# Altium PCB tpms-master.pcbdoc
Units mm, origin at the board's own origin, x right, y up, seen from the top; angles counter-clockwise.
Board outline 79.25 x 49.25 mm, 2 copper layers (Top Layer, Bottom Layer); 57 components, 84 nets, 235 pads, 34 vias.
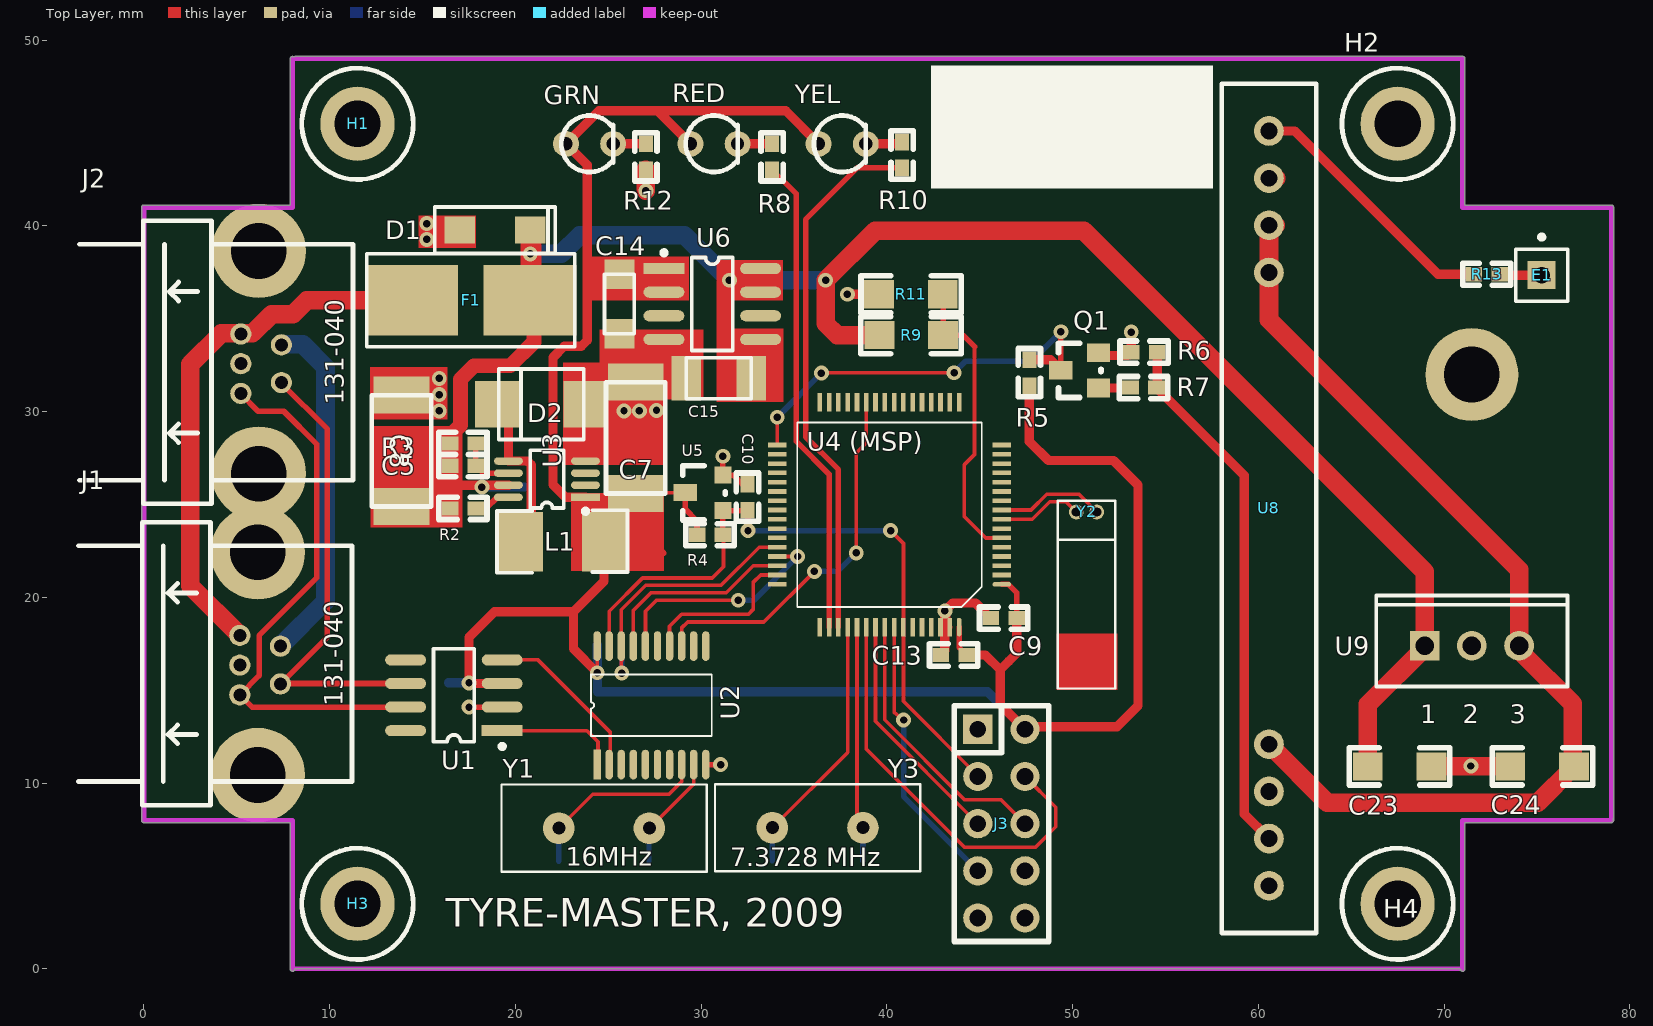
[diagram p0: Top Layer view]
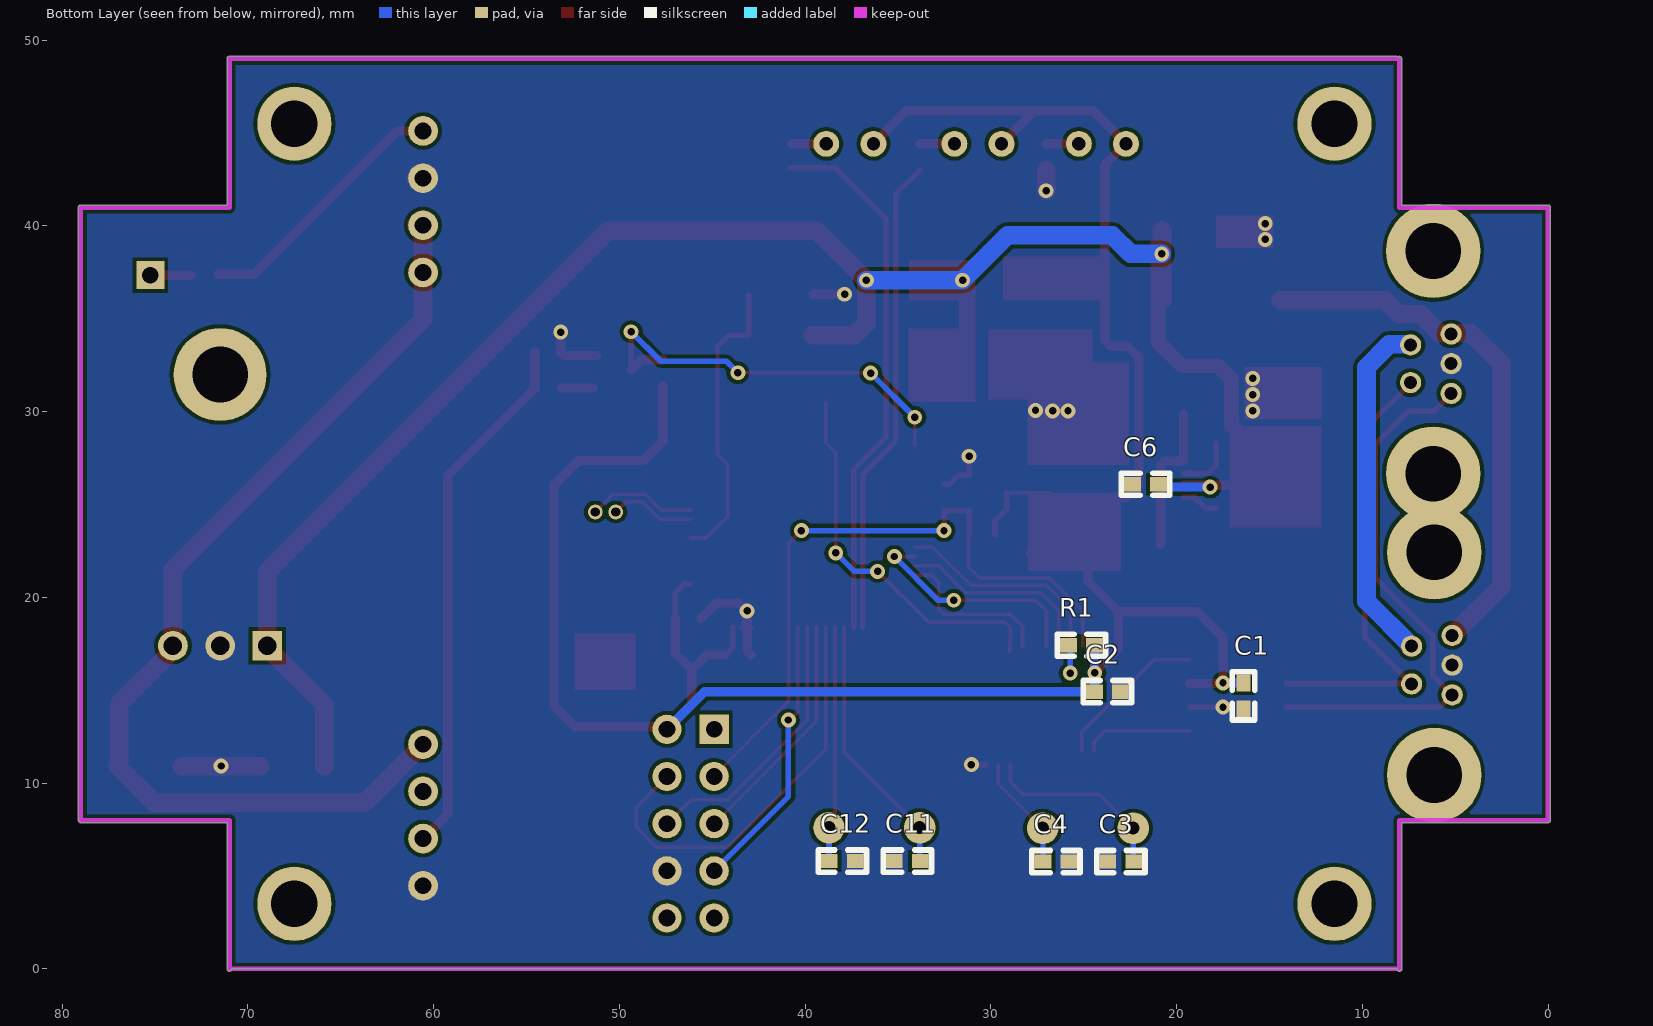
[diagram p1: Bottom Layer view, seen from below]

## Layer stack, top to bottom
Top Layer: signal copper 0.0356
Dielectric: dielectric 0.32, FR-4, Dk 4.8
Bottom Layer: signal copper 0.0356

## Board outline
7.873,0 7.873,7.873 0,7.873 cw(c0,8) -0.127,8 -0.127,41 cw(c0,41) 0,41.127 7.873,41.127 7.873,49 cw(c8,49) 8.067,49.109 cw(c8.133,49) 8.133,49.127 71,49.127 cw(c71,49) 71.127,49 71.127,41.127 79,41.127 cw(c79,41) 79.127,41 79.127,8.093 cw(c79,8.093) 79.119,8.046 cw(c79,8) 79.127,8 cw(c79,8) 79,7.873 71.127,7.873 71.127,0 cw(c71,0) 70.873,-0.001 8.133,-0.001 cw(c8.133,0.127) 8.127,-0.001 cw(c8,0)

## Design rules (kind name [scope] priority, off if disabled: settings)
Clearance [All] p1: gap=0.2
HoleSize [All] p1: absolutevalues=TRUE maxlimit=10 minlimit=0.3 maxpercent=80.000 minpercent=20.000
PolygonConnect PolygonConnect_1 [All vs IsNamedPolygon('Bottom Layer-GND')] p1: connectstyle=Direct reliefconductorwidth=0.254 reliefentries=4 polygonreliefangle="90 Angle"
PolygonConnect [All] p2: connectstyle=Relief reliefconductorwidth=0.254 reliefentries=4 polygonreliefangle="90 Angle"
RoomDefinition U_3V-Switcher-50mA [InComponentClass('U_3V-Switcher-50mA')] p1: confinementstyle=ConfineIn formatcopy=TRUE lockcomponents=FALSE outline 11.925,21.025 28.4,21.025 28.4,32.9 11.925,32.9
RoutingVias [All] p1: holewidth=0.4 width=0.8 viastyle="Through Hole" minholewidth=0.3 minwidth=0.7 maxholewidth=1 maxwidth=1.2
SilkscreenOverComponentPads [All] p1: minsilkscreentomaskgap=0.254
SolderMaskExpansion [All] p1: expansion=0.102
TestPointUsage [All] p1: valid=0 allowmultiple=FALSE
Testpoint [All] p1: side=15 testpointundercomponent=TRUE minsize=1.016 maxsize=2.54 preferedsize=1.524 minholesize=0 maxholesize=1.016 preferedholesize=0.813 testpointgrid=0.025 style=1023 order=0-112345678
Width [All] p1: maxlimit=20 minlimit=0.2 preferedwidth=0.254 toplayer_prefwidth=0.5 bottomlayer_prefwidth=0.3 minimp=50.000000 maximp=50.000000 favimp=50.000000
22 further rules are at their usual default settings.

## Classes and differential pairs
component class "Unisolated CAN": C1 C2 C3 C4 C14 C15 D1 D3 F1 F2 J1 J2 R1 U1 U2 U6 Y1
component class U_3V-Switcher-50mA: C5 C6 C7 C8 D2 L1 R2 R3 U3
component class TopLevel: E1 GRN H1 H2 H3 H4 Q1 R5 R6 R7 R8 R9 R10 R11 R12 R13 RED U8 YEL
component class MSP430: C9 C10 C11 C12 C13 J3 R4 "U4 (MSP)" U5 Y2 Y3

## Components (designator, comment, footprint, x,y, rotation, side; value= is the part's Value field where it differs from the comment)
C1 "100nF" 0603 16.4,14 r90 bottom
C2 "100nF" 0603 24.425,14.925 r180 bottom
C3 "15pF" 0603 23.7,5.775 r180 bottom
C4 "15pF" 0603 25.8,5.775 r0 bottom
C5 "1n" 0603 16.473,27.093 r0 top
C6 "100nF" 0603 20.973,26.093 r0 bottom
C7 "4u7 35V" MCCT-CASEC 26.473,25.593 r90 top
C8 "4u7 35V" MCCT-CASEC 13.873,24.893 r90 top
C9 "100nF" 0603 46.991,18.884 r180 top
C10 "10nF" 0603 32.5,24.7 r90 top
C11 "18pF" 0603 33.8,5.8 r0 bottom
C12 "18pF" 0603 38.7,5.8 r180 bottom
C13 "100nF" 0603 44.3,16.9 r180 top
C14 "2.2u" MCCT-CASEA 25.6,35.8 r90 top
C15 "10u" MCCT-CASEB 32.7,31.8 r180 top
C23 "100u" 1206 65.9,10.9 r0 top
C24 "100u" 1206 77,10.9 r180 top
D1 "12V Transient Suppressor" SMA 18.9,39.775 r0 top
D2 "MBRS130" SMB 21.4,30.4 r180 top
E1 "Antenna" PIN1 75.257,37.353 r0 top
F1 "125mA/3A" LITTELFUSE-154 17.6,36 r0 top
GRN "Green" LED0.1 22.725,44.425 r0 top (schematic designator D6)
H1 "HOLE" M2.5 11.5,45.5 r0 top
H2 "HOLE" M2.5 67.5,45.5 r0 top
H3 "HOLE" M2.5 11.5,3.5 r0 top
H4 "HOLE" M2.5 67.5,3.5 r0 top
J1 "CON5-S" TRIAD5F 7.345,17.373 r90 top
J2 "CON5-S" TRIAD5F 7.4,33.6 r90 top
J3 "Tritium JTAG Connector" IDC10 44.9,12.9 r270 top
L1 "330uH" 1812 20.273,22.993 r0 top
Q1 "ZXM61N02F" SOT23-3 51.4,31.275 r90 top
R1 "10k" 0603 25.825,17.425 r180 bottom
R2 "100k" 0603 17.873,24.793 r180 top
R3 "1R2" 0603 16.473,28.293 r0 top
R4 "10k" 0603 31.175,23.375 r180 top
R5 "10k" 0603 47.675,32.8 r270 top
R6 "10k" 0603 53.157,33.203 r0 top
R7 "100" 0603 54.518,31.297 r180 top
R8 "1K" 0603 33.825,43.025 r90 top
R9 "100k" 1206 39.6,34.125 r0 top
R10 "1K" 0603 40.825,43.125 r90 top
R11 "20K" 1206 43.004,36.325 r180 top
R12 "1K" 0603 27.025,43.025 r90 top
R13 "0 Ohm Link" 0603 71.6,37.4 r0 top
RED "Yel" LED0.1 29.425,44.425 r0 top (schematic designator D4)
U1 "SN65HVD232" SO8 16.688,14.732 r90 top
U2 "MCP2515X/ST" TSSOP20 24.4,11 r90 top
U3 "LTC1474" TSOP8 23.773,25.393 r180 top
"U4 (MSP)" "MSP430F149" QFP64 46.2,20.7 r180 top (schematic designator U4)
U5 "XC61CN2002MR" SOT23(3) 31.175,24.675 r90 top
U6 "MIC5200" SO8 30.6,35.8 r270 top
U8 "RLPA" RLPA 60.575,4.475 r90 top
U9 "MC78M05CT" 221A-04 71.5,17.4 r0 top
Y1 "16MHz" HC49/4H 30.3,7.575 r180 top
Y2 "32.768 KHz" WATCHA 51.3,24.6 r180 top
Y3 "7.3728 MHz" HC49/4H 41.8,7.6 r180 top
YEL "Red" LED0.1 36.325,44.425 r0 top (schematic designator D5)

## Footprints (in the part's own frame and the unit in brackets; to place one, negate y for a bottom-side part, rotate by r counter-clockwise, add the part's x,y. Pads: shape width x height; smd on the part's side, far side on the other; paste and mask are expansions set on the pad)
221A-04 [mm] "TO, Thru-Hole, Vertical, Heatsink Mounted; 3 In-Line Leads; Pitch 2.54 mm"
  rect 1.6x1.6 hole 1: 1(-2.54,0)
  round 1.6 hole 1: 2(0,0) 3(2.54,0)
  silkscreen extent -5.15,-2.2 5.15,2.7
0603 [mil]
  rect 35.43x30 smd: 1(0,0) 2(55,0)
  silkscreen extent -24,-24 79,24
1206 [mil]
  rect 62.99x60 smd: 1(0,0) 2(135,0)
  silkscreen extent -39,-39 173,39
1812 [mm]
  rect 2.4x3.2 smd: 1(0,0) 2(4.5,0)
  silkscreen extent -1.27,-1.66 5.77,1.7
HC49/4H [mm]
  round 1.7 hole 0.7: 1(3.085,0) 2(7.965,0)
  silkscreen extent 0,-2.35 11.05,2.35
IDC10 [mil]
  rect 62x62 hole 35.43: 1(0,0)
  round 62 hole 35.43: 2(0,100) 3(100,0) 4(100,100) 5(200,0) 6(200,100) 7(300,0) 8(300,100) 9(400,0) 10(400,100)
  silkscreen extent -50,-50 450,150
LED0.1 [mil]
  round 55 hole 28: A(0,0) K(100,0)
  silkscreen extent -10,-60 100,60
LITTELFUSE-154 [mm]
  rect 5x3.81 smd: 1(-3.185,0) 2(3.185,0)
  silkscreen extent -5.6,-2.51 5.6,2.5
M2.5 [mm]
  round 4 hole 2.5: 1(0,0)
  silkscreen extent -3,-3 3,3
MCCT-CASEA [mm]
  rect 1.6x1.6 smd: 1(-1.6,0) 2(1.6,0)
  silkscreen extent -1.6,-0.8 1.6,0.8
MCCT-CASEB [mm]
  rect 1.6x2.4 smd: 1(0,0) 2(3.5,0)
  silkscreen extent 0,-1.1 3.5,1.1
MCCT-CASEC [mm]
  rect 2x3 smd: 1(0,0) 2(6,0)
  silkscreen extent 0,-1.6 6,1.6
PIN1 [mm]
  rect 1.5x1.5 hole 0.9: 1(0,0)
  silkscreen extent -1.4,-1.4 1.4,2.17
QFP64 [mm]
  oval 1x0.25 smd: 1(0.008,-0.005)
  rect 1x0.25 smd: 2(0.008,-0.505) 3(0.008,-1.005) 4(0.008,-1.505) 5(0.008,-2.005) 6(0.008,-2.505) 7(0.008,-3.005) 8(0.008,-3.505) 9(0.008,-4.005) 10(0.008,-4.505) 11(0.008,-5.005) 12(0.008,-5.505) 13(0.008,-6.005) 14(0.008,-6.505) 15(0.008,-7.005) 16(0.008,-7.505) 33(12.108,-7.505) 34(12.108,-7.005) 35(12.108,-6.505) 36(12.108,-6.005) 37(12.108,-5.505) 38(12.108,-5.005) 39(12.108,-4.505) 40(12.108,-4.005) 41(12.108,-3.505) 42(12.108,-3.005) 43(12.108,-2.505) 44(12.108,-2.005) 45(12.108,-1.505) 46(12.108,-1.005) 47(12.108,-0.505) 48(12.108,-0.005)
  rect 0.25x1 smd: 17(2.308,-9.805) 18(2.808,-9.805) 19(3.308,-9.805) 20(3.808,-9.805) 21(4.308,-9.805) 22(4.808,-9.805) 23(5.308,-9.805) 24(5.808,-9.805) 25(6.308,-9.805) 26(6.808,-9.805) 27(7.308,-9.805) 28(7.808,-9.805) 29(8.308,-9.805) 30(8.808,-9.805) 31(9.308,-9.805) 32(9.808,-9.805) 49(9.808,2.295) 50(9.308,2.295) 51(8.808,2.295) 52(8.308,2.295) 53(7.808,2.295) 54(7.308,2.295) 55(6.808,2.295) 56(6.308,2.295) 57(5.808,2.295) 58(5.308,2.295) 59(4.808,2.295) 60(4.308,2.295) 61(3.808,2.295) 62(3.308,2.295) 63(2.808,2.295)
  oval 0.25x1 smd: 64(2.308,2.295)
  silkscreen extent 1.09,-8.72 11.02,1.21
RLPA [mm]
  round 1.6 hole 0.9: 1(0,0) 2(2.54,0) 3(5.08,0) 4(7.62,0) 5(33.02,0) 6(35.56,0) 7(38.1,0) 8(40.64,0)
  silkscreen extent -2.54,-2.54 43.18,2.54
SMA [mm]
  rect 1.65x1.45 smd: A(-1.9,0) K(1.9,0)
  silkscreen extent -3.25,-1.25 3.25,1.25
SMB [mm]
  rect 2.4x2.5 smd: A(-2.385,0) K(2.385,0)
  silkscreen extent -2.28,-1.9 2.3,1.9
SO8 [mm]
  rect 0.6x2.2 smd: 1(-1.905,-2.6)
  oval 0.6x2.2 smd: 2(-0.635,-2.6) 3(0.635,-2.6) 4(1.905,-2.6) 5(1.905,2.6) 6(0.635,2.6) 7(-0.635,2.6) 8(-1.905,2.6)
  silkscreen extent -2.88,-2.72 2.5,1.1
SOT23(3) [mil]
  rect 36x36 smd: 1(0,0) 2(75,0)
  rect 36x50 smd: 3(38,80)
  silkscreen extent -20,-5 95,85
SOT23-3 [mm]
  rect 1x1.25 smd: 1(0,0) 2(1.905,0) 3(0.965,2.032)
  silkscreen extent -0.51,-0.13 2.41,2.16
TRIAD5F [mil]
  round 200 hole 118.11: 0(-273,48) 0(199,48)
  round 45 hole 27.56: 1(0,0) 2(23,86) 3(-40,86) 4(-103,86) 5(-80,0)
  silkscreen extent -337,-152 263,428
TSOP8 [mm]
  rect 1.55x0.4 smd: 1(0,0)
  oval 1.55x0.4 smd: 2(0,-0.65) 3(0,-1.3) 4(0,-1.95) 5(4.15,-1.95) 6(4.15,-1.3) 7(4.15,-0.65) 8(4.15,0)
  silkscreen extent -0.13,-2.52 2.98,0.87
TSSOP20 [mm]
  rect 1.6x0.4 smd: 1(0,0)
  oval 1.6x0.4 smd: 2(0,-0.65) 3(0,-1.3) 4(0,-1.95) 5(0,-2.6) 6(0,-3.25) 7(0,-3.9) 8(0,-4.55) 9(0,-5.2) 10(0,-5.85) 11(6.38,-5.85) 12(6.38,-5.2) 13(6.38,-4.55) 14(6.38,-3.9) 15(6.38,-3.25) 16(6.38,-2.6) 17(6.38,-1.95) 18(6.38,-1.3) 19(6.38,-0.65) 20(6.38,0)
  silkscreen extent 1.53,-6.18 4.85,0.33
WATCHA [mm]
  round 0.8 hole 0.5: 1(0,0) 2(1.1,0)
  silkscreen extent -1,-0.6 2.1,9.5

## Part data
C1 C2 C3 C4 C5 C6 C9 C10 C11 C12 C13 C14 C15: library part CAP, "Capacitor"
C7 C8: library part "Cap Pol3", "Polarized Capacitor (Surface Mount)"
C23 C24: library part CAP-POL, "Capacitor"
D1: library part DIODE, "Diode"
D2: library part "D SCHOTTKY", "Schottky Diode"
E1: "Generic Antenna"
F1: library part FUSE2, "Fuse"
GRN RED YEL: library part LED
H1 H2 H3 H4: "Hole"
J1 J2: "Connector, 2 pin, with shield @ S"
J3: library part 430F_JTAG_TRITIUM, "Tritium JTAG interface for MSP430"
L1: library part Inductor, "Inductor"
Q1: library part ZXM61P03F, "1.1A, 30V P-Channel Enhancement mode FET"
R1 R9 R11: library part RES1
R2 R3 R4 R5 R6 R7 R8 R10 R12 R13: library part RES1, "Resistor"
U1: "3.3V CAN Transciever"
U2: library part MCP2510X/ST, "MCP2510 CAN Controller"
U3: "Step-down converter"
"U4 (MSP)": library part MSP430F14X
U5: library part XC61F, "SOT23 reset generator"
U6: "MIC5200 - SO8"
U8: library part MAX1626, "MAX1626"
U9: "3-Terminal Medium-Current Positive Fixed Voltage Regulator"
Y1 Y2 Y3: library part CRYSTAL, "Crystal"

## Free pads (board coordinates)
  round 5 hole 3: 1(71.5,32)

## Via types
v1: diameter 0.8, hole 0.4, Top Layer to Bottom Layer, 33 vias
v2: diameter 0.8, hole 0.4, Top Layer to Bottom Layer, tented top, 1 vias

## Nets (pads, with @x,y where several pads share a name; then routed paths per layer and width w, separated by ;. In a path a pad name is that pad's centre, name@x,y a point inside that pad or via, vN(x,y) a via of type N, cw(c..) or ccw(c..) an arc to the next point about the centre after c; other vN are vias at no path point)
3V3: "U4 (MSP).1" "U4 (MSP).64" C1.2 C2.1 C7.1 C9.1 C13.1 C14.2 GRN.A J3.2 L1.2 R1.2 R4.2 R5.2 RED.A U1.3 U2.20 U3.1 U5.3 U6.1 U6.2 YEL.A | length 134
  Top Layer w0.2: v1(24.407,15.948) U2.20@24.407,17.38 ; C7.1@26.79,25.64 U5.3
  Top Layer w0.3: U1.3@19.288,15.4 U1.3@19.3,15.4 ; 27.723,22.651 27.991,22.383 ; U5.3 29.143,24.757 29.778,24.122 R4.2 ; 43.892,18.405 43.892,17.308 C13.1 ; 46.192,20.705 46.545,20.705 46.991,20.259 C9.1
  Top Layer w0.5: v1(17.5,15.4) 17.5,17.85 18.875,19.225 23.125,19.225 ; v1@17.533,15.367 U1.3 ; U3.1 22.698,25.393 22.023,26.068 22.023,32.923 22.625,33.525 23.55,33.525 23.867,33.842 23.867,43.283 GRN.A 24.5,46.2 27.65,46.2 ; v1(24.407,15.948) 23.125,17.23 23.125,19.225 ; L1.2 24.773,20.873 23.125,19.225 ; RED.A 27.65,46.2 ; YEL.A 34.55,46.2 27.65,46.2 ; C13.1 45.3,16.9 46.1,16.1 ; C9.1 46.991,16.991 46.563,16.563 46.1,16.1 ; R5.2 47.675,28.4 48.7,27.375 52.2,27.375 53.525,26.05 53.525,14.175 52.393,13.043 47.583,13.043 J3.2 46.1,14.24 46.1,16.1
  Bottom Layer w0.3: C1.2 C1.2@16.403,15.397 ; R1.2@24.428,17.422 R1.2
  Bottom Layer w0.5: C1.2@16.403,15.4 v1(17.5,15.4) ; R1.2@24.407,17.445 24.407,17.425 24.418,15.948 C2.1 45.415,14.925 J3.2
5V: C24.1 U8.4 U8.5 U8.6 U9.3 | length 54.9
  Top Layer w1: U8.4 63.72,8.95 75.05,8.95 C24.1 ; U8.6@60.935,40.035 U8.6 U8.5 60.575,34.95 74.04,21.485 U9.3 ; U9.3@74.19,17.55 74.19,17.01 76.925,14.275 C24.1@76.925,10.9
"12V MEASURE": "U4 (MSP).6" R9.2 R11.1 | length 16
  Top Layer w0.2: 44.725,33.5 44.725,27.7 44.175,27.15 44.175,24.35 45.32,23.205 46.192,23.205
  Top Layer w0.3: R11.1@43.029,36.3 R9.2 44.1,34.125 44.725,33.5
/RESET: "U4 (MSP).58" C10.1 J3.3 R4.1 U2.19 U5.1 | length 37.4
  Top Layer w0.2: U2.19 25.05,19.25 26.85,21.05 30.6,21.05 31.2,21.65 R4.1@31.2,23.375 ; v1(40.2,23.6) 40.892,22.908 40.892,14.408 44.9,10.4 J3.3
  Top Layer w0.3: R4.1 U5.1 C10.1@32.475,24.675 ; C10.1 32.5,23.575 v1(32.525,23.6)
  Bottom Layer w0.3: v1(32.525,23.6) v1(40.2,23.6)
ADC0: "U4 (MSP).59"
ADC1: "U4 (MSP).60"
ADC2: "U4 (MSP).61"
ADC3: "U4 (MSP).2"
ADC4: "U4 (MSP).3"
ADC5: "U4 (MSP).4"
ADC6: "U4 (MSP).5"
AGND: "U4 (MSP).11"
AREF: "U4 (MSP).10"
CAN+5V: 
CAN+12V: C5.1 C6.1 C8.1 C15.1 C23.1 D1.K F1.2 R2.2 R3.1 R9.1 U3.7 U6.5 U6.7 U6.8 U9.1 | length 102.9
  Top Layer w0.5: 16.473,26.043 U3.7
  Top Layer w0.8: R3.1@16.023,28.243 17.048,29.268 17.048,31.748 17.775,32.475 19.723,32.475 20.998,33.75 ; F1.2 F1.2@20.975,35.81 ; 20.996,33.743 D1.K@20.996,39.078
  Top Layer w1: R3.1 16.473,28.243 16.474,27.093 16.475,26.043 R2.2 ; F1.2 D1.K@20.785,39.775 ; D1.K@20.785,39.76 D1.K ; R9.1 37.325,34.125 36.7,34.75 v1(36.7,37.075) 39.375,39.75 50.6,39.75 68.96,21.39 U9.1 ; C23.1 65.9,14.24 U9.1@69.01,17.35
  Bottom Layer w0.5: v1(18.198,25.943) C6.1@20.823,25.943
  Bottom Layer w1: v1(20.8,38.5) 22.475,38.5 23.475,39.5 29.1,39.5 v1(31.525,37.075) v1(36.7,37.075)
CAN_5V_RAIL: J1.1 J2.1 | length 19
  Bottom Layer w1: J1.1 9.775,19.803 9.775,32.4 8.546,33.629 7.4,33.629 J2.1@7.345,33.629
CAN_CS: "U4 (MSP).44" R1.1 U2.18 | length 15.3
  Top Layer w0.2: v1@25.7,15.95 25.7,19.334 27.016,20.65 31.07,20.65 33.125,22.705 34.092,22.705 ; U2.18@25.75,16.625 U2.18@25.75,17.38
  Bottom Layer w0.3: v1(25.725,15.925) R1.1@25.725,17.325
CAN_H: J1.4 J2.4 U1.7 | length 29.7
  Top Layer w0.3: J2.4@5.161,31.013 5.203,30.971 6.148,30.025 7.525,30.025 9.3,28.25 9.3,21.05 6.2,17.95 6.2,15.796 J1.4 5.82,14.097 U1.7
CAN_INT: "U4 (MSP).27" U2.13 | length 20.7
  Top Layer w0.2: U2.13 28.95,18.35 29.275,18.675 33.375,18.675 v1(36.1,21.4) ; U2.13@29,17.075 U2.13@29,17.38 ; v1(38.35,22.4) 38.35,27.775 38.892,28.317 38.892,30.505
  Bottom Layer w0.3: v1(36.1,21.4) 37.35,21.4 v1(38.35,22.4)
CAN_L: J1.5 J2.5 U1.6 | length 25.1
  Top Layer w0.3: J1.5 J1.5@7.371,15.367 ; J2.5@7.345,31.597 7.387,31.555 9.875,29.067 9.875,17.871 J1.5@7.371,15.367 ; U1.6 J1.5@7.371,15.367
CANGND: "U4 (MSP).62" "U4 (MSP).63" C1.1 C2.2 C3.1 C4.1 C6.2 C7.2 C8.2 C9.2 C10.2 C11.2 C12.2 C13.2 C14.1 C15.2 C23.2 C24.2 D1.A D2.A J1.3 J2.3 J3.8 Q1.2 R6.1 R11.2 R12.1 U1.2 U2.10 U3.4 U5.2 U6.4 U8.1 U8.7 U9.2 | length 22.3
  Top Layer w0.2: v1@43.3,19.375 43.314,19.361 43.314,19.275 43.314,18.484
  Top Layer w0.3: v1(17.503,14.097) U1.2 ; U2.10 v1(31.05,11) ; v1(31.175,27.6) U5.2 31.745,26.58 32.228,26.097 C10.2 ; 42.892,18.405 43.125,18.405 43.392,18.405
  Top Layer w0.5: v1(37.875,36.325) R11.2 ; C13.2 43.125,17.122 43.125,18.405 v1(43.125,19.275) 43.55,19.7 44.778,19.7 C9.2 ; Q1.2@51.25,33.025 R6.1@52.979,33.025 ; R6.1 v1(53.157,34.282)
  Top Layer w1: v2(27.025,41.9) R12.1 ; U8.7 U8.7@60.975,42.575 ; C23.2 C24.2
  other v1: 71.45,10.925 15.898,30.043 25.848,30.043 26.673,30.043 27.598,30.068 15.898,30.918 15.898,31.793 15.225,39.275 15.225,40.125
LEDRED: "U4 (MSP).51" R10.1 | length 29
  Top Layer w0.3: 37.392,18.405 37.392,26.883 35.625,28.65 35.625,40.35 38.4,43.125 R10.1
LEDYLW: "U4 (MSP).50" R8.1 | length 25.9
  Top Layer w0.3: R8.1 35.125,41.725 35.125,28.4 36.892,26.633 36.892,18.405
NetC3_2: C3.2 U2.8 Y1.2 | length 10.3
  Top Layer w0.2: Y1.2 24.16,9.4 28.275,9.4 28.95,10.075 U2.8
  Bottom Layer w0.3: C3.2@22.335,5.807 Y1.2
NetC4_2: C4.2 U2.9 Y1.1 | length 6.2
  Top Layer w0.2: Y1.1 29.6,9.96 U2.9
  Bottom Layer w0.25: C4.2 Y1.1@27.197,7.557
NetC5_2: C5.2 R3.2 U3.6 | length 3.1
  Top Layer w0.3: R3.2 C5.2 18.27,26.693 U3.6
NetD2_K: D2.K L1.1 U3.5 | length 8.1
  Top Layer w0.5: D2.K@19.623,29.868 U3.5 20.648,27.343 20.848,27.143 L1.1@20.848,22.868
NetD4_K: R8.2 RED.K | length 1.9
  Top Layer w0.5: RED.K R8.2@33.822,44.425
NetD5_K: R10.2 YEL.K | length 1.9
  Top Layer w0.5: YEL.K R10.2@40.728,44.425
NetD6_K: GRN.K R12.2 | length 1.8
  Top Layer w0.5: GRN.K R12.2@27.022,44.425
NetE1_1: E1.1 R13.2 | length 2.2
  Top Layer w0.5: R13.2@73.05,37.353 E1.1
NetF1_1: F1.1 J1.2 J2.2 | length 29
  Top Layer w1: J1.2 2.5,20.618 2.5,32.55 4.163,34.213 5.216,34.213 5.838,34.213 6.875,35.25 8.025,35.25 8.775,36 F1.1
NetQ1_1: Q1.1 R7.2 | length 1.7
  Top Layer w0.5: Q1.1 R7.2@53.099,31.275
NetR2_1: R2.1 U3.8 | length 2
  Top Layer w0.3: R2.1 18.423,24.793 19.023,25.393 U3.8
NetR6_2: R6.2 R7.1 U8.2 | length 28.7
  Top Layer w0.5: R7.1 59.25,26.565 59.25,8.34 U8.2 ; R7.1@54.554,31.333 R6.2
NetR13_1: R13.1 U8.8 | length 14.2
  Top Layer w0.5: U8.8 61.96,45.115 69.675,37.4 R13.1
NetU1_1: U1.1 U2.1 | length 5.9
  Top Layer w0.2: U1.1 23.848,12.827 24.45,12.225 U2.1@24.45,11.725
NetU1_4: U1.4 U2.2 | length 8.4
  Top Layer w0.2: U1.4 21.213,16.637 25.1,12.75 U2.2@25.1,11.725
NetU2_3: U2.3
P1.0: "U4 (MSP).12"
P1.1: "U4 (MSP).13"
P1.2: "U4 (MSP).14"
P1.3: "U4 (MSP).15"
P1.4: "U4 (MSP).16"
P1.5: "U4 (MSP).17"
P1.6: "U4 (MSP).18"
P1.7: "U4 (MSP).19"
P2.0: "U4 (MSP).20"
P2.1: "U4 (MSP).21"
P2.2: "U4 (MSP).22"
P2.3: "U4 (MSP).23"
P2.4: "U4 (MSP).24"
P2.5: "U4 (MSP).25"
P2.6: "U4 (MSP).26"
P3.0: "U4 (MSP).28"
P3.1: "U4 (MSP).29"
P3.2: "U4 (MSP).30"
P3.3: "U4 (MSP).31"
P3.4: "U4 (MSP).32"
P3.5: "U4 (MSP).33" Q1.3 R5.1 | length 22.7
  Top Layer w0.2: 34.092,28.205 34.1,28.213 v1(34.1,29.7) ; v1(36.475,32.075) 36.45,32.1 v1(43.625,32.1)
  Top Layer w0.3: Q1.3 v1(49.368,34.307)
  Top Layer w0.5: R5.1 48.808,32.8 Q1.3
  Bottom Layer w0.3: v1(34.1,29.7) v1(36.475,32.075) ; v1(43.625,32.1) 44.24,32.715 47.776,32.715 v1(49.368,34.307)
P3.6: "U4 (MSP).34"
P3.7: "U4 (MSP).35"
P4.0: "U4 (MSP).36"
P4.1: "U4 (MSP).37"
P4.2: "U4 (MSP).38"
P4.3: "U4 (MSP).39"
P4.4: "U4 (MSP).40"
P4.5: "U4 (MSP).41"
P4.6: "U4 (MSP).42"
P4.7: "U4 (MSP).43"
P5.1: "U4 (MSP).45" U2.16 | length 12.4
  Top Layer w0.2: U2.16 27,19.25 27.6,19.85 v1(32,19.85) ; 34.092,22.205 v1(35.195,22.205)
  Bottom Layer w0.3: v1(32,19.85) 32.839,19.85 v1(35.195,22.205)
P5.2: "U4 (MSP).46" U2.17 | length 10.7
  Top Layer w0.2: U2.17 26.35,19.3 27.3,20.25 31.35,20.25 32.805,21.705 34.092,21.705
P5.3: "U4 (MSP).47" U2.14 | length 8.9
  Top Layer w0.2: U2.14 28.3,18.45 28.95,19.1 32.55,19.1 32.8,19.35 32.8,20.8 33.205,21.205 34.092,21.205
P5.4: "U4 (MSP).48"
P5.5: "U4 (MSP).49"
TCK: "U4 (MSP).57" J3.7 | length 15
  Top Layer w0.2: 40.392,18.405 40.392,13.808 v1(40.9,13.4)
  Bottom Layer w0.3: v1(40.9,13.4) 40.9,9.28 J3.7
TDI: "U4 (MSP).55" J3.5 | length 12.9
  Top Layer w0.2: 39.392,18.405 39.392,13.328 J3.5
TDO: "U4 (MSP).54" J3.4 | length 22.8
  Top Layer w0.2: 38.892,18.405 38.892,11.833 44.175,6.55 48,6.55 49.1,7.65 49.1,8.7 J3.4
TMS: "U4 (MSP).56" J3.6 | length 14.9
  Top Layer w0.2: 39.892,18.405 39.892,13.408 44.2,9.1 46.16,9.1 J3.6
VREF: "U4 (MSP).7"
XT1IN: "U4 (MSP).8" Y2.2 | length 4.6
  Top Layer w0.2: 46.192,24.205 47.83,24.205 48.775,25.15 49.65,25.15 Y2.2
XT1OUT: "U4 (MSP).9" Y2.1 | length 5.9
  Top Layer w0.2: 46.192,24.705 47.765,24.705 48.609,25.55 50.35,25.55 Y2.1
XT2IN: "U4 (MSP).53" C12.1 Y3.1 | length 12.7
  Top Layer w0.2: 38.392,18.405 38.392,7.923 Y3.1
  Bottom Layer w0.3: C12.1@38.715,5.815 Y3.1
XT2OUT: "U4 (MSP).52" C11.1 Y3.2 | length 14.3
  Top Layer w0.2: Y3.2 37.892,11.657 37.892,18.405
  Bottom Layer w0.3: C11.1@33.835,5.835 Y3.2
pads on no net: H1.1 H2.1 H3.1 H4.1 J1.0 J2.0 J3.1 J3.9 J3.10 U1.5 U1.8 U2.4 U2.5 U2.6 U2.7 U2.11 U2.12 U2.15 U3.2 U3.3 U6.3 U6.6 U8.3

## Polygon pours and split planes (outlines as drawn)
CANGND on Bottom Layer "Bottom Layer-GND" (solid, remove dead copper, pour order 1000): 0,41 8,41 8,48.867 8.133,49 71,49 71,41 79,41 79,8 71,8 71,0.25 70.75,0 8,0 8,8.075 7.825,8.25 0,8.25 0,41

## Keep-outs
Keep-Out Layer:
  lines w0.254: 8,49 8,41 0,41 0,8 8,8 8,0 71,0 71,8 79,8 ; 8.133,49 71,49 71,41 79,41 79,8.093

## Other copper
Top Layer:
  rectangle net 3V3: 23.625,36 29.35,38.35
  rectangle net CAN+12V: 30.825,30.525 34.425,34.475
  rectangle net CAN+12V: 30.825,35.975 34.4,38.175
  rectangle net CAN+12V: 30.825,30.525 31.725,38.175
  rectangle net CANGND: 24.525,30.65 30.125,34.425
  region: 49.125,18.05 49.125,15.025 52.425,15.025 52.425,18.05
  rectangle net CANGND: 14.775,38.825 17.875,40.575
  rectangle net CANGND: 12.173,29.593 16.348,32.418
  rectangle net CAN+12V: 12.198,23.768 17.148,29.218
  rectangle net 3V3: 22.998,21.418 27.998,25.618
  rectangle net CANGND: 22.573,27.118 28.023,32.643

## Silkscreen, mask and mechanical layers (free items; w line width, h text height)
Top Overlay:
  rectangle: 42.375,42.025 57.55,48.65
  text "TYRE-MASTER, 2009" at 16.256,2.268 h1.52
Top Solder:
  region: 49.125,18.05 49.125,15.025 52.4,15.025 52.4,18.05
Mechanical 1:
  lines w0.254: 8,49 8,41 0,41 0,8 8,8 8,0 71,0 71,8 79,8 ; 8.133,49 71,49 71,41 79,41 79,8.093

## Text inside footprints (layer, text, board x,y; h text height)
J1: Top Overlay "131-040" at 10.698,14.147 h1 r90
J2: Top Overlay "131-040" at 10.753,30.374 h1 r90
U9: Top Overlay "3" at 73.54,13.225 h1; Top Overlay "2" at 71,13.225 h1; Top Overlay "1" at 68.71,13.225 h1